# Altium PCB 12V_ESB.PcbDoc
Units mm, origin at the board's own origin, x right, y up, seen from the top; angles counter-clockwise.
Board outline 109.48 x 25.21 mm, 2 copper layers (Top Layer, Bottom Layer); 36 components, 16 nets, 99 pads, 2 vias.
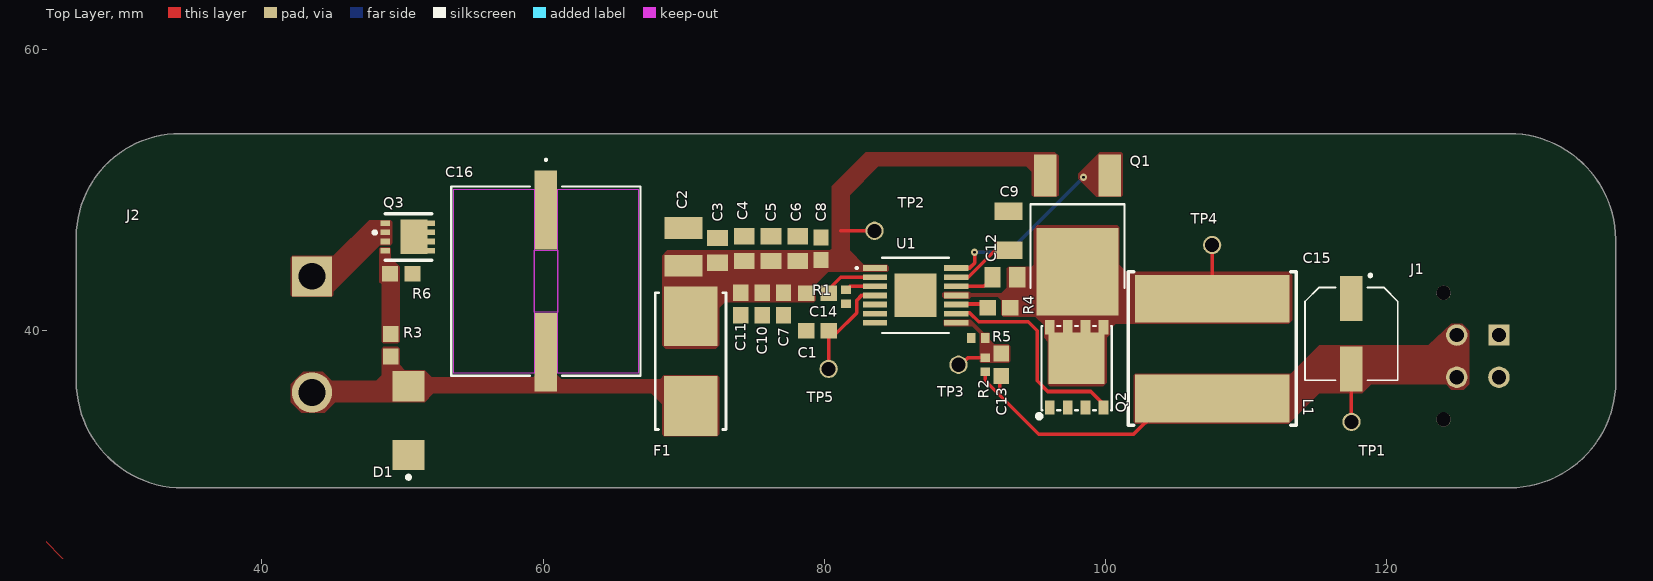
[diagram p0: Top Layer view]
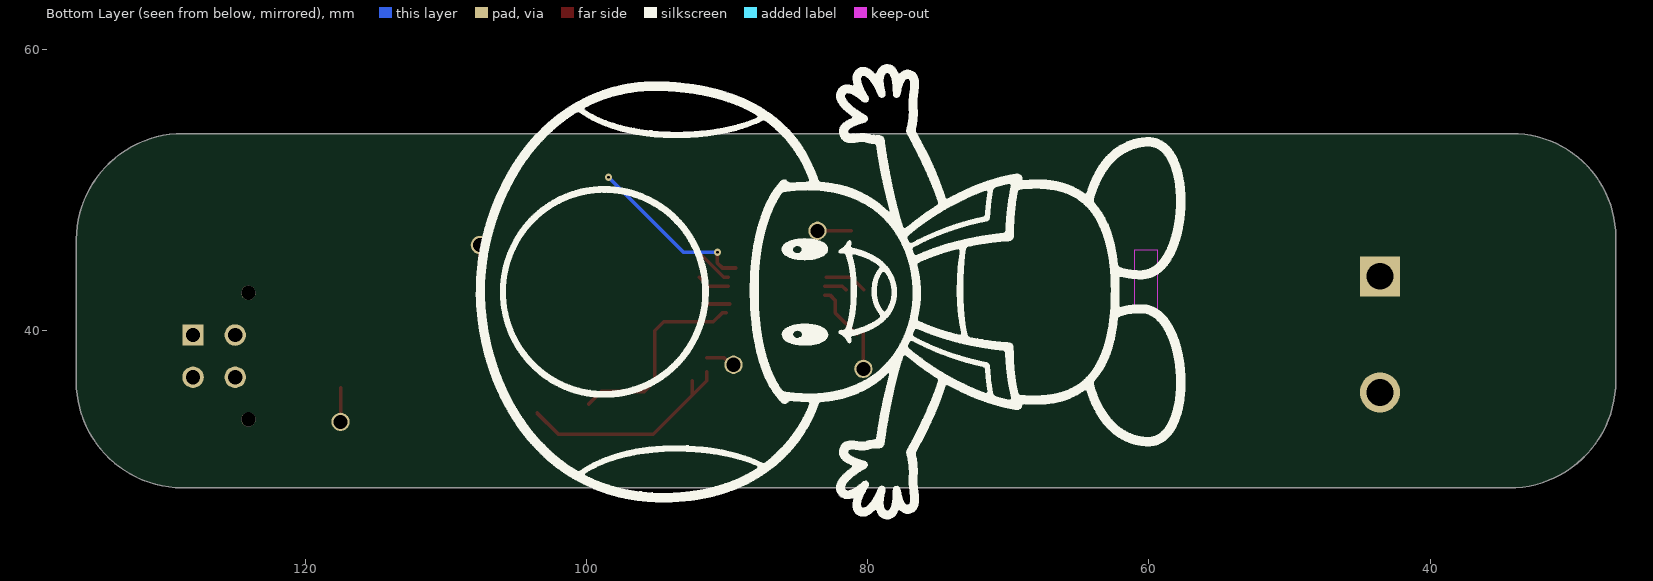
[diagram p1: Bottom Layer view, seen from below]

## Layer stack, top to bottom
Top Solder: solder mask 0.0102, Solder Resist, Dk 3.5
Top Layer: signal copper 0.0356
Dielectric 1: dielectric 0.32, FR-4, Dk 4.8
Bottom Layer: signal copper 0.0356
Bottom Solder: solder mask 0.0102, Solder Resist, Dk 3.5

## Board outline
26.797,36.449 26.797,46.609 26.794,46.669 cw(c34.181,46.646) 34.204,54.032 128.695,54.034 128.696,54.034 cw(c128.672,46.436) 136.27,46.499 136.271,46.482 136.271,36.449 136.274,36.403 cw(c128.675,36.428) 128.759,28.829 128.733,28.826 34.371,28.826 cw(c34.396,36.425)

## Design rules (kind name [scope] priority, off if disabled: settings)
BoardOutlineClearance [All] p1: gap=0.2 ignorepadtopadclearanceinfootprint=FALSE
Clearance [All] p1: gap=0.127 ignorepadtopadclearanceinfootprint=FALSE except(0.25: Arc-Hole Track-Hole SMDPad-Hole THPad-Hole Via-Hole Fill-Hole Poly-Hole Region-Hole Text-Hole)
ComponentClearance [All] p1: gap=0.127 collisioncheckmode=3 verticalgap=0.127 showdistances=TRUE
DiffPairsRouting [All] p1: maxlimit=0.254 minlimit=0.127 mostfreqgap=0.127 toplayer_minwidth=0.127 toplayer_maxwidth=25.4 toplayer_prefwidth=0.127 bottomlayer_minwidth=0.127 bottomlayer_maxwidth=25.4 bottomlayer_prefwidth=0.127 maxuncoupledlength=12.7
Height [All] p1: minheight=0 maxheight=1816.048 prefheight=12.7
HoleSize [All] p1: absolutevalues=TRUE maxlimit=6.3 minlimit=0.3 maxpercent=80.000 minpercent=20.000
HoleToHoleClearance [All] p1: gap=0.25 allowstackedmicrovias=FALSE
MinimumAnnularRing [All] p1: minimumring=0.076
MinimumSolderMaskSliver [All] p1: minsoldermaskwidth=0
PlaneClearance [All] p1: clearance=0.127
PlaneConnect PlaneConnectPowerPads [InPadClass('PowerPads')] p1: planeconnectstyle=Direct reliefexpansion=0.508 reliefentries=4 reliefconductorwidth=0.254 reliefairgap=0.254
PlaneConnect [All] p2: pad.planeconnectstyle=Relief pad.reliefexpansion=0.3 pad.reliefentries=4 pad.reliefconductorwidth=0.127 pad.reliefairgap=0.127 via.planeconnectstyle=Direct via.reliefexpansion=0.3 via.reliefentries=4 via.reliefconductorwidth=0.127 via.reliefairgap=0.127
PolygonConnect PolygonConnectPowerPads [All vs (InPadClass('PowerPads'))] p1: connectstyle=Direct reliefconductorwidth=0.254 reliefentries=4 polygonreliefangle="90 Angle" airgapwidth=0.254
PolygonConnect [All] p2: connectstyle=Direct reliefconductorwidth=0.127 reliefentries=4 polygonreliefangle="90 Angle" airgapwidth=0.127
RoutingVias [All] p1: holewidth=0.3 width=0.6 viastyle="Through Hole" minholewidth=0.3 minwidth=0.6 maxholewidth=0.6 maxwidth=6.6
SilkToSilkClearance [All] p1: silktosilkclearance=0
SilkToSolderMaskClearance [IsPad] p1: minsilkscreentomaskgap=0.127 clearancetoexposedcopper=TRUE
SolderMaskExpansion [All] p1: expansion=0.075 istentingtop=FALSE
SupplyNets "Schematic Supply Nets_3" [InNet('12V_ESB')] p1: voltage=0.000
SupplyNets "Schematic Supply Nets_2" [InNet('PGND')] p2: voltage=0.000
SupplyNets "Schematic Supply Nets_1" [InNet('VBAT_12V_ESB')] p3: voltage=0.000
SupplyNets "Schematic Supply Nets" [InNet('VBAT_12_ESB')] p4: voltage=0.000
Width [All] p1: maxlimit=25.4 minlimit=0.127 preferedwidth=0.127 minimp=50.000000 maximp=50.000000 favimp=50.000000
20 further rules are at their usual default settings.

## Classes and differential pairs
component class 12V_ESB: C1 C3 C5 C6 C7 C8 C9 C10 C11 C12 C13 C14 C15 C16 D1 F1 J1 L1 Q1 Q2 Q3 R1 R2 R3 R4 R5 R6 TP1 TP2 TP3 TP4 TP5 U1

## Components (designator, comment, footprint, x,y, rotation, side; value= is the part's Value field where it differs from the comment)
C1 "C0603Y102K1RAC7867" CAP-0603 79.502,40.005 r180 top
C2 "CL32B106KBJNNNE" CAP-1210 69.977,45.974 r270 top
C3 "CC0805KKX7R9BB105" CAP-0805 72.39,45.72 r270 top
C4 "CC0805KRX7R9BB104" CAP-0805 74.295,45.847 r270 top
C5 "GRM2195C1H103JA01D" CAP-0805 76.2,45.847 r270 top
C6 "CDR01BX102BKUS7185" CAP-0805 78.105,45.847 r270 top
C7 "0603N101J101CT" CAP-0603 77.089,41.91 r90 top
C8 "0603N100J500CT" CAP-0603 79.756,45.847 r270 top
C9 "CC1206KKX7R0BB225" CAP-1206 93.091,47.117 r90 top
C10 "CC0603KPX7R9BB103" CAP-0603 75.565,41.91 r270 top
C11 "CC0603KRX7R0BB104" CAP-0603 74.041,41.91 r270 top
C12 "CC0805JRNPO9BN471" CAP-0805 92.837,43.815 r0 top
C13 "CC0603JRNPO9BN121" CAP-0603 92.583,37.592 r90 top
C14 "CC0402KRX7R9BB153" CAP-0402 81.534,42.418 r270 top
C15 "EEE-FNE181XUP" CAP-180uF 117.729,44.363 r270 top
C16 "100SEV100M12.5X16" CAP-100U-0002 60.198,43.536 r270 top
D1 "SMBJ40CA" "DO-214AA (SMBJ)" 50.419,33.655 r270 top
F1 "01550900M" FUSE-0001 70.485,37.846 r90 top
J1 "Molex 43045-0412" CONN-4POS-0002 127.968,38.203 r90 top
J2 "1546927-2" CONN-1546927-2 43.561,39.751 r0 top
L1 "FEXL1010A-5R6M" IND-5.6UH-0002 107.569,38.735 r270 top
Q1 "RU6080L" NMOS-80A-0001 97.546,45.546 r90 top
Q2 "CSD19533Q5A" NMOS-100A 98.298,36.83 r0 top
Q3 "CSD18543Q3AT" IC-8VSONCLIP 47.891,48.517 r270 top
R1 "RC0603FR-07287KL" RES-0603 79.502,42.672 r0 top
R2 "RC0402FR-07191KL" RES-0402 91.44,37.592 r90 top
R3 "RC0603FR-07200KL" RES-0603 49.149,38.989 r90 top
R4 "RC0603FR-071K47L" RES-0603 92.418,41.656 r0 top
R5 "RC0402FR-0710KL" RES-0402 90.932,39.497 r180 top
R6 "RC0603FR-07100KL" RES-0603 49.911,44.069 r0 top
TP1 "5003" TEST-POINT-0001 117.475,33.528 r0 top
TP2 "5003" TEST-POINT-0001 83.566,47.117 r0 top
TP3 "5003" TEST-POINT-0001 89.535,37.592 r0 top
TP4 "5003" TEST-POINT-0001 107.569,46.101 r0 top
TP5 "5003" TEST-POINT-0001 80.302,37.3 r0 top
U1 "LM3150" IC_ESB 86.106,42.799 r0 top

## Footprints (in the part's own frame and the unit in brackets; to place one, negate y for a bottom-side part, rotate by r counter-clockwise, add the part's x,y. Pads: shape width x height; smd on the part's side, far side on the other; paste and mask are expansions set on the pad)
CAP-100U-0002 [mil]
  rect 221x63 smd paste+0 mask+0: 1(-199,0) 2(199,0)
  Top Layer keep-out region: -86.5,-33.5 -86.5,33.5 86.5,33.5 86.5,-33.5
  Top Layer keep-out region: -258,33.5 -258,258 258,258 258,33.5
  Top Layer keep-out region: -258,-258 -258,-33.5 258,-33.5 258,-258
  Keep-Out Layer region: -86.5,-33.5 -86.5,33.5 86.5,33.5 86.5,-33.5
  silkscreen extent -342,-265 265,265, body extent -281,-260 281,260, height 652
CAP-180uF [mm] "EEEFNE181XUP"
  rect 3.2x1.6 smd: 1(2.072,-0.254) 2(7.072,-0.254)
  silkscreen extent 0.32,-3.55 7.87,3.05, body extent 0.92,-3.55 8.22,3.05, height 7.7
CAP-0402 [mm]
  rect 0.6x0.7 smd: 1(-0.5,0) 2(0.5,0)
  body extent -0.5,-0.22 0.5,0.23, height 0.5
CAP-0603 [mm]
  rect 1.15x1.1 smd: 1(-0.8,0) 2(0.8,0)
  body extent -0.8,-0.45 0.8,0.45, height 0.8
CAP-0805 [mm]
  rect 1.16x1.47 smd: 1(-0.88,0) 2(0.88,0)
  body extent -1,-0.63 1,0.63, height 0.94
CAP-1206 [mm]
  rect 1.25x2 smd: 1(-1.375,0) 2(1.375,0)
  body extent -1.6,-0.8 1.6,0.8, height 1.5
CAP-1210 [mm]
  rect 1.53x2.72 smd: 1(-1.341,0) 2(1.341,0)
  body extent -1.6,-1.25 1.6,1.25, height 2.7
CONN-4POS-0002 [mm]
  round 1.02 hole 1.02 unplated: 1(-4.5,3.94) 1(4.5,3.94)
  rect 1.482x1.482 / inner rect 1.524x1.524 / far side rect 1.482x1.482 hole 1.02: 1(1.5,0)
  round 1.53 / inner round 1.524 / far side round 1.53 hole 1.02: 2(-1.5,0) 3(1.5,3) 4(-1.5,3)
  body extent -5.07,-2.45 5.08,6.32, height 10.03
CONN-1546927-2 [mm]
  rect 2.85x2.85 hole 1.9: 1(0,4.127)
  round 2.85 hole 1.9: 2(0,-4.127)
  body extent -11.57,-8.85 4.49,8.85, height 14.99
"DO-214AA (SMBJ)" [mm]
  rect 2.16x2.26 smd: 1(-2.416,0) 2(2.484,0)
  silkscreen extent 3.94,-0.12 4.19,0.13, body extent -2.72,-1.95 2.78,1.95, height 2.45
FUSE-0001 [mil]
  rect 167x150 smd paste+0 mask+0: 1(-125.5,0) 2(125.5,0)
  silkscreen extent -192,-99 192,99, body extent -213,-103 213,103, height 10
IC-8VSONCLIP [mm]
  rect 0.4x0.7 smd paste-100 mask+0.05: 1(2.812,0.877) 2(0.862,0.877) 2(1.512,0.877) 2(2.162,0.877) 3(0.862,4.077) 3(1.512,4.077) 3(2.162,4.077) 3(2.812,4.077)
  rect 2.45x1.9 smd paste-100 mask+0.05: 3(1.837,2.917)
  silkscreen extent 0.19,0.03 3.49,4.18, body extent 0.18,0.89 3.48,4.19, height 1.1
IC_ESB [mil] "LM3150"
  rect 68x16 smd paste-34 mask-34: 1(-99,65.87) 2(-99,40.28) 3(-99,14.68) 4(-99,-10.91) 5(-99,-36.5) 6(-99,-62.09) 7(-99,-87.68) 8(129,-87.68) 9(129,-62.09) 10(129,-36.5) 11(129,-10.91) 12(129,14.68) 13(129,40.28) 14(129,65.87)
  rect 118x122 smd paste-61 mask-61: 15(15,-10.91)
  silkscreen extent -153,-116 108,95, body extent -111,-111 141,90, height 43
IND-5.6UH-0002 [mm]
  rect 3.4x11 smd: 1(-3.55,0) 2(3.55,0)
  silkscreen extent -5.46,-5.97 5.46,5.97
NMOS-80A-0001 [mm] "RU6080L"
  rect 3x1.6 smd: 1(5.503,-2.74) 3(5.503,1.84)
  rect 6.2x5.8 smd: 2(-1.345,-0.45)
  silkscreen extent -2.51,-3.8 3.46,2.9
NMOS-100A [mm] "CSD19533Q5A"
  rect 0.7x1 smd paste-100 mask+0.05: 1(1.54,-2.273) 2(-2.27,-2.273) 2(-1,-2.273) 2(0.27,-2.273) 3(-2.27,3.427) 3(-1,3.427) 3(0.27,3.427) 3(1.54,3.427)
  rect 3.98x3.66 smd paste-100 mask+0.05: 3(-0.365,1.207)
  silkscreen extent -3.17,-3.05 2.13,3.53, body extent -2.93,-2.49 2.17,3.51, height 1.05
RES-0402 [mm]
  rect 0.6x0.7 smd: 1(-0.5,0) 2(0.5,0)
  body extent -0.5,-0.25 0.5,0.25, height 0.3
RES-0603 [mm]
  rect 1.15x1.1 smd: 1(-0.8,0) 2(0.8,0)
  body extent -0.8,-0.4 0.8,0.4, height 0.43
TEST-POINT-0001 [mm] "2024 miniature test point"
  round 1.3 hole 1: 1(0,0)
  body extent -1.27,-1.27 1.27,1.27, height 4.57

## Part data
C1: library part CAP-1N-0001, "1000 pF ±10% 100V Ceramic Capacitor X7R 0603 (1608 Metric)", Capacitance="1 nF +/-10%", Voltage=100V
C2: library part CAP-10U-0002, "CAP CER 10UF 50V X7R 1210", Capacitance="10 uF", Voltage=50V, ComponentLink1Description=Datasheet, ComponentLink1URL=https://mm.digikey.com/Volume0/opasdata/d220001/medias/docus/41/CL32B106KBJNNNE_Spec.pdf, Device Class=Ceramic, Size=1210
C3: library part CAP-1U-0001, "CAP CER 1UF 50V X7R 0805", Capacitance="1.0 uF", Voltage="50 V", ComponentLink2Description=Datasheet, ComponentLink2URL=https://www.yageo.com/upload/media/product/productsearch/datasheet/mlcc/UPY-GPHC_X7R_6.3V-to-250V_24.pdf, Device Class=Ceramic, Size=0805
C4: library part CAP-0.1U-0002, "CAP CER 0.1UF 50V X7R 0805", Capacitance="100 nF", Voltage Rating="50 V", ComponentLink2Description=Datasheet, ComponentLink2URL=https://www.yageo.com/upload/media/product/productsearch/datasheet/mlcc/UPY-GPHC_X7R_6.3V-to-250V_24.pdf, Device Class=Ceramic, Size=0805
C5: library part CAP-10N-0001, "CAP CER 10000PF 50V C0G/NP0 0805", Capacitance=10nF, Voltage=50V, ComponentLink1Description=Datasheet, ComponentLink1URL=https://search.murata.co.jp/Ceramy/image/img/A01X/G101/ENG/GRM2195C1H103JA01-01.pdf, Device Class=Ceramic, Size=0805
C6: library part CAP-1N-0003, "1000 pF ±10% 100V Ceramic Capacitor BX 0805 (2012 Metric)", Capacitance="1 nF", Package Size=0805, Voltage Rating=100V
C7: library part CAP-100P-0002, "100 pF ±5% 100V Ceramic Capacitor C0G, NP0 0603 (1608 Metric)", Capacitance="100 pF", Package Size=0603, Temp Coeff=C0G/NP0, Tolerance=+/-5%, Voltage=100V
C8: library part CAP-10P-0001, "10 pF ±5% 50V Ceramic Capacitor C0G, NP0 0603 (1608 Metric)", Capacitance="10 pF +/- 5%", Manufacturer="Walshin Technology Corporation", Package Size=0603, Temperature Coefficient="C0G, NP0", Voltage Rating=50V, Assembled?=Yes, Manufacturer Part Number=0603N100J500CT
C9: library part CAP-2.2U-0001, "CAP CER 2.2UF 100V X7R 1206", Capacitance=2.2uF, Voltage=100V, ComponentLink1Description=Datasheet, ComponentLink1URL=https://www.yageo.com/upload/media/product/productsearch/datasheet/mlcc/UPY-GPHC_X7R_6.3V-to-250V_24.pdf, Device Class=Ceramic, Size=1206
C10: library part CAP-10N-0002, "CAP CER 10000PF 50V X7R 0603", Capacitance="10 nF", Voltage="50 V", ComponentLink2Description=Datasheet, ComponentLink2URL=http://www.yageo.com/documents/recent/UPY-GPHC_X7R_6.3V-to-50V_18.pdf, Device Class=Ceramic, Size=0603
C11: library part CAP-100N-0001, "CAP CER 0.1UF 100V X7R 0603", Capacitance="100 nF", Voltage="100 V", ComponentLink1Description=Datasheet, ComponentLink1URL=https://www.yageo.com/upload/media/product/app/datasheet/mlcc/upy-np0x7r_mv_100-to-630v.pdf, Device Class=Ceramic, Size=0603
C12: library part CAP-470P-0001, "CAP CER 470PF 50V C0G/NPO 0805", Capacitance="470 pF", Voltage=50V, ComponentLink1Description=Datasheet, ComponentLink1URL=https://www.yageo.com/upload/media/product/productsearch/datasheet/mlcc/UPY-GP_NP0_16V-to-50V_18.pdf, Device Class=Ceramic, Size=0805
C13: library part CAP-120pF-0001, "CAP CER 120PF 50V C0G/NPO 0603", Capacitance=120pF, Voltage=50V
C14: library part CAP-15N-0001, "50V 15nF X7R ±10% 0402 Multilayer Ceramic Capacitors MLCC - SMD/SMT ROHS", Capacitance=15nF, Voltage=50V
C15: library part CAP-180uF-0001, "CAP ALUM 180UF 20% 25V SMD", Capacitance=180uF, Voltage=25V
C16: library part CAP-100U-0002, "100 µF 100 V Aluminum Electrolytic Capacitors Radial, Can - SMD 2000 Hrs @ 85°C", Capacitance=100uF, Voltage=100V
D1: library part DIO-TVS-0001, "TVS DIODE 40VWM 64.5VC DO214AA", Current Rating=9.3A, Voltage Rating=64.5V, ComponentLink1Description=Datasheet, ComponentLink1URL=https://www.littelfuse.com/media?resourcetype=datasheets&itemid=09a6ae9a-73cb-4ac4-acac-e6dab92ab953&filename=littelfuse_tvs_diode_smbj_datasheet.pdf
F1: library part FUSE-0001, "FUSE BLOK CARTRIDGE 125V 10A SMD", Fuse Current=8A, Voltage Rating=125V, ComponentLink2Description=Datasheet, ComponentLink2URL=https://www.littelfuse.com/~/media/electronics/datasheets/fuses/littelfuse_fuse_154_154t_154l_154tl_datasheet.pdf.pdf
J1: library part CONN-4POS-0002, "CONN HEADER VERT 4POS 3MM", ComponentLink1Description=Datasheet, ComponentLink1URL=https://www.molex.com/content/dam/molex/molex-dot-com/products/automated/en-us/salesdrawingpdf/430/43045/430450412_sd.pdf?inline
J2: library part CONN-2POS-0003
L1: library part IND-5.6U-0002, "21.2A 5.6uH Integrated molded inductor ±20% 23.6A SMD,11x11.9mm Power Inductors ROHS", Current Rating=21.2A, Inductance=5.6uH
Q1: library part NMOS-80A-0001, "60V 80A 7mΩ@10V,30A 125W 3V TO-252-2 MOSFETs ROHS", Continuous Current=80A, Voltage=60V
Q2: library part NMOS-100A-0001, "100V 100A 7.8mΩ@10V,13A 3.2W 2.8V 1 N-channel VSONP-8(5x6) MOSFETs ROHS", Continuous Current=100A, Voltage=100V
Q3: library part NMOS-60A-0001, "MOSFET N-CH 60V 12A/60A 8VSON", Continuous Current=60A, Voltage=60V, ComponentLink2Description=Datasheet, ComponentLink2URL=http://www.ti.com/lit/ds/symlink/csd18543q3a.pdf
R1: library part RES-287k-0001, "RES 287K OHM 1% 1/10W 0603", Power=1/10W, Resistance=287k
R2: library part RES-191k-0001, "191 kOhms ±1% 0.063W, 1/16W Chip Resistor 0402 (1005 Metric) Moisture Resistant Thick Film", Power=1/16W, Resistance=191k
R3: library part RES-200k-0001, "RES SMD 200K OHM 1% 1/10W 0603", Power=100mW, Resistance=200k, Tolerance=1%, ComponentLink1Description=Datasheet, ComponentLink1URL=https://www.yageo.com/upload/media/product/products/datasheet/rchip/PYu-RC_Group_51_RoHS_L_12.pdf, Size=0603
R4: library part RES-1.47k-0001, "RES 1.47K OHM 1% 1/10W 0603", Power=1/10W, Resistance=1.47k
R5: library part RES-10k-0001, "RES 10K OHM 1% 1/16W 0402", Power=1/16W, Resistance=10k, Tolerance=1%, ComponentLink1Description=Datasheet, ComponentLink1URL=https://www.yageo.com/upload/media/product/products/datasheet/rchip/PYu-RC_Group_51_RoHS_L_12.pdf, Size=0402
R6: library part RES-100k-0001, "RES SMD 100K OHM 1% 1/10W 0603", Power=100mW, Resistance=100k, Tolerance=1%, ComponentLink1Description=Datasheet, ComponentLink1URL=https://www.yageo.com/upload/media/product/products/datasheet/rchip/PYu-RC_Group_51_RoHS_L_12.pdf, Size=0603
TP1 TP2 TP3 TP4 TP5: library part TEST-POINT-0001, "Oranange PC Test Point, Miniature Phoisphor Bronze Silver Plating Through Hole Mounting Type"
U1: library part IC-ESB-0001, "Buck Regulator Positive Output Step-Down DC-DC Controller IC 14-HTSSOP"

## Via types
v1: diameter 0.508, hole 0.203, Top Layer to Bottom Layer, 2 vias

## Nets (pads, with @x,y where several pads share a name; then routed paths per layer and width w, separated by ;. In a path a pad name is that pad's centre, name@x,y a point inside that pad or via, vN(x,y) a via of type N, cw(c..) or ccw(c..) an arc to the next point about the centre after c; other vN are vias at no path point)
12V_ESB: C13.1 C15.2 J1.3 J1.4 L1.2 R2.1 TP1.1 | length 18.3
  Top Layer w0.254: R2.1 91.44,36.449 95.25,32.639 101.981,32.639 L1.2@103.505,34.163 ; 92.456,35.433 C13.1@92.456,36.449 ; TP1.1 C15.2@117.475,35.941
BST: C12.1 U1.12 | length 2.3
  Top Layer w0.254: U1.12@89.916,43.18 91.322,43.18 C12.1
EN: C1.1 TP5.1 U1.4 | length 6.7
  Top Layer w0.254: TP5.1 C1.1 ; C1.1@80.772,39.751 82.296,41.275 82.296,42.164 82.677,42.545 U1.4@83.058,42.545
FB: C13.2 R2.2 R5.1 TP3.1 U1.8 | length 2.1
  Top Layer w0.254: TP3.1 89.707,37.592 90.207,38.092 R2.2
HG: Q1.1 U1.14 | length 12.2
  Top Layer w0.254: U1.14 90.319,44.472 90.678,44.831 v1(90.678,45.593)
  Bottom Layer w0.254: v1(90.678,45.593) 93.091,45.593 v1(98.425,50.927)
ILIM: R4.1 U1.10 | length 1.7
  Top Layer w0.254: U1.10@89.789,41.91 R4.1@91.44,41.91
LG: Q2.1 U1.9 | length 14.5
  Top Layer w0.254: U1.9@90.043,41.275 90.335,41.275 90.97,40.64 94.488,40.64 95.123,40.005 95.123,36.449 95.885,35.687 98.933,35.687 Q2.1@99.822,34.798
NetJ2_1: J2.1 Q3.2
NetQ3_1: Q3.1 R3.2 R6.1
PGND: C1.2 C2.1 C3.1 C4.1 C5.1 C6.1 C7.1 C8.1 C9.2 C10.2 C11.2 C14.2 C15.1 C16.1 D1.2 J1.1 J1.2 Q2.2 Q3.3 R5.2 R6.2 U1.5 U1.6 U1.7
RON: R1.2 U1.2 | length 3
  Top Layer w0.254: R1.2@80.264,42.926 81.153,43.815 U1.2@82.931,43.815
SS: C14.1 U1.3 | length 1.6
  Top Layer w0.254: C14.1 81.796,43.18 U1.3@83.058,43.18
SW: C12.2 L1.1 Q1.2 Q2.3 R4.2 TP4.1 U1.11 | length 3.2
  Top Layer w0.254: L1.1@107.569,42.926 TP4.1
VBAT_12_ESB: C2.2 C3.2 C4.2 C5.2 C6.2 C7.2 C8.2 C10.1 C11.1 F1.2 Q1.3 R1.1 TP2.1 U1.1 | length 2.4
  Top Layer w0.254: 81.153,47.117 TP2.1
VBAT_12V_ESB: C16.2 D1.1 F1.1 J2.2 R3.1
VCC: C9.1 U1.13 | length 3
  Top Layer w0.254: U1.13@89.916,43.815 90.223,43.815 C9.1@92.15,45.742
pads on no net: U1.15

## Polygon pours and split planes (outlines as drawn)
VBAT_12V_ESB on Top Layer "VBAT_12V_ESB_L01_P028" (solid, pour order 28): 48.641,38.862 48.514,38.735 48.514,36.83 48.133,36.449 44.958,36.449 44.323,37.084 42.926,37.084 42.037,36.195 42.037,34.925 42.799,34.163 44.45,34.163 45.212,34.925 51.562,34.925 52.197,35.56 67.691,35.56 68.453,34.798 68.453,32.639 68.58,32.512 72.39,32.512 72.517,32.639 72.517,36.703 72.39,36.83 68.58,36.83 68.326,36.576 61.29,36.576 60.997,36.84 59.436,36.83 59.398,36.792 59.309,36.703 52.07,36.703 51.562,37.211 50.165,37.211 49.784,37.592 49.784,38.735 49.657,38.862
12V_ESB on Top Layer "Top Layer-12V_ESB" (solid, pour order 24): 118.237,35.56 118.872,36.195 124.206,36.195 124.587,35.814 125.476,35.814 125.857,36.195 125.857,40.005 125.349,40.513 124.587,40.513 122.936,38.989 115.189,38.989 113.157,36.957 102.108,36.957 101.981,36.83 101.981,33.528 102.108,33.401 113.03,33.401 115.189,35.56 116.713,35.56
VBAT_12_ESB on Top Layer "VBAT_12_ESB_L01_P003" (solid, pour order 3): 68.707,38.735 68.453,38.989 68.453,45.339 68.834,45.72 80.391,45.72 80.518,45.847 80.518,50.292 82.931,52.705 96.393,52.705 96.647,52.451 96.647,49.657 96.52,49.53 94.869,49.53 94.742,49.657 94.742,51.308 94.361,51.689 83.82,51.689 81.788,49.657 81.788,45.72 82.804,44.704 84.455,44.704 84.582,44.577 84.582,44.323 84.455,44.196 80.264,44.196 79.375,43.307 79.375,42.164 79.248,42.037 72.898,42.037 72.517,41.656 72.517,38.989 72.263,38.735
NetJ2_1 on Top Layer "NETJ2_1_L01_P000" (solid, pour order 0): 49.149,47.879 49.276,47.752 49.276,46.228 49.149,46.101 48.387,46.101 45.085,42.799 45.085,42.545 44.958,42.418 42.164,42.418 42.037,42.545 42.037,45.212 42.164,45.339 45.085,45.339 47.625,47.879
PGND on Top Layer "NONET_L01_P025" (solid, shelved, pour order 25): 19.939,63.373 137.16,63.373 143.764,56.769 143.256,56.261 143.256,19.685 29.972,19.685 20.447,29.21 20.447,56.642
FB on Top Layer "FB_L01_P021" (solid, pour order 21): 89.749,40.791 88.523,40.791 88.481,40.748 88.481,40.39 88.537,40.333 90.507,40.333 91.059,39.781 91.059,37.812 91.13,37.741 93.113,37.741 93.218,37.846 93.218,38.902 93.072,39.048 92.069,39.048 91.752,39.364 91.752,39.83 91.712,39.871 91.32,39.871 90.4,40.791 90.165,40.791
SW on Top Layer "SW_L01_P014" (solid, pour order 14): 90.297,42.799 88.519,42.799 88.392,42.672 88.392,42.418 88.519,42.291 90.297,42.291 90.424,42.418 92.329,42.418 92.583,42.164 92.583,41.148 92.71,41.021 94.996,41.021 95.631,40.386 95.631,39.497 95.885,39.243 95.885,36.195 96.012,36.068 99.822,36.068 100.076,36.322 100.076,39.497 100.33,39.751 100.33,40.132 100.711,40.513 113.03,40.513 113.284,40.767 113.284,43.942 113.03,44.196 101.473,44.196 100.965,44.704 100.965,47.371 100.838,47.498 95.123,47.498 94.869,47.244 94.869,44.704 94.742,44.577 93.091,44.577 92.964,44.45 92.964,43.053 92.583,42.672 90.424,42.672
NetQ3_1 on Top Layer "NETQ3_1_L01_P013" (solid, pour order 13): 48.514,39.243 48.641,39.116 49.657,39.116 49.784,39.243 49.784,44.577 49.149,45.212 49.149,45.888 49.096,45.941 49.095,45.94 48.441,45.94 48.353,45.852 48.353,43.468 48.514,43.307
HG on Top Layer "HG_L01_P004" (solid, pour order 4): 98.044,51.181 99.568,52.705 101.092,52.705 101.219,52.578 101.219,49.657 101.092,49.53 99.314,49.53 98.044,50.8
PGND on Bottom Layer "NONET_L02_P026" (solid, shelved, pour order 26): 24.257,64.77 140.97,64.77 150.749,54.991 142.748,46.99 142.748,15.875 30.48,15.875 22.86,23.495 22.86,58.166

## Silkscreen, mask and mechanical layers (free items; w line width, h text height)
Bottom Overlay:
  drawing of 5 lines, arcs and shapes, not listed
Mechanical 13:
  lines w0.254: 26.922,46.669 cw(c34.181,46.646) 34.204,53.905 128.695,53.907 cw(c128.672,46.436) 136.143,46.412 ; 26.924,36.449 ccw(c34.396,36.425) 34.372,28.954 128.733,28.954 ; 26.924,36.576 26.924,46.609 ; 128.651,28.956 ccw(c128.675,36.428) 136.146,36.404 ; 136.144,36.449 136.144,46.482